# EAGLE board MRCS-Integrated-Turnout-Controller-array (EAGLE 7.7.0)
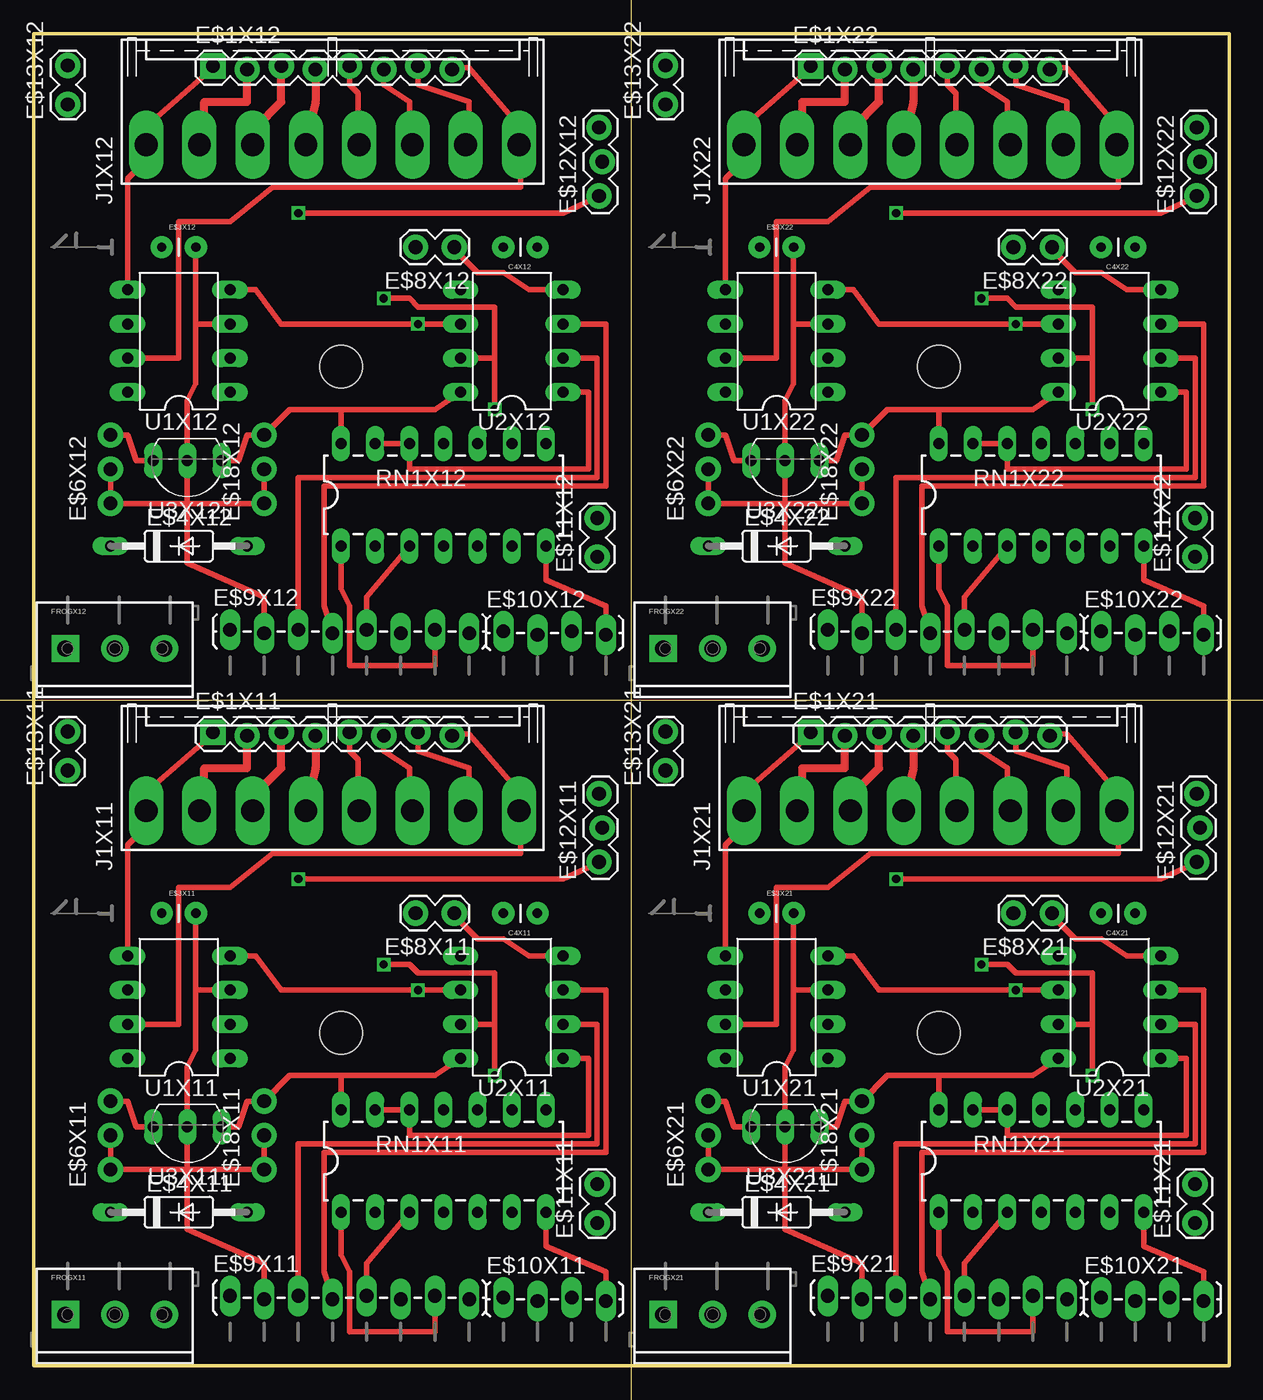
[diagram p0: board, top side]
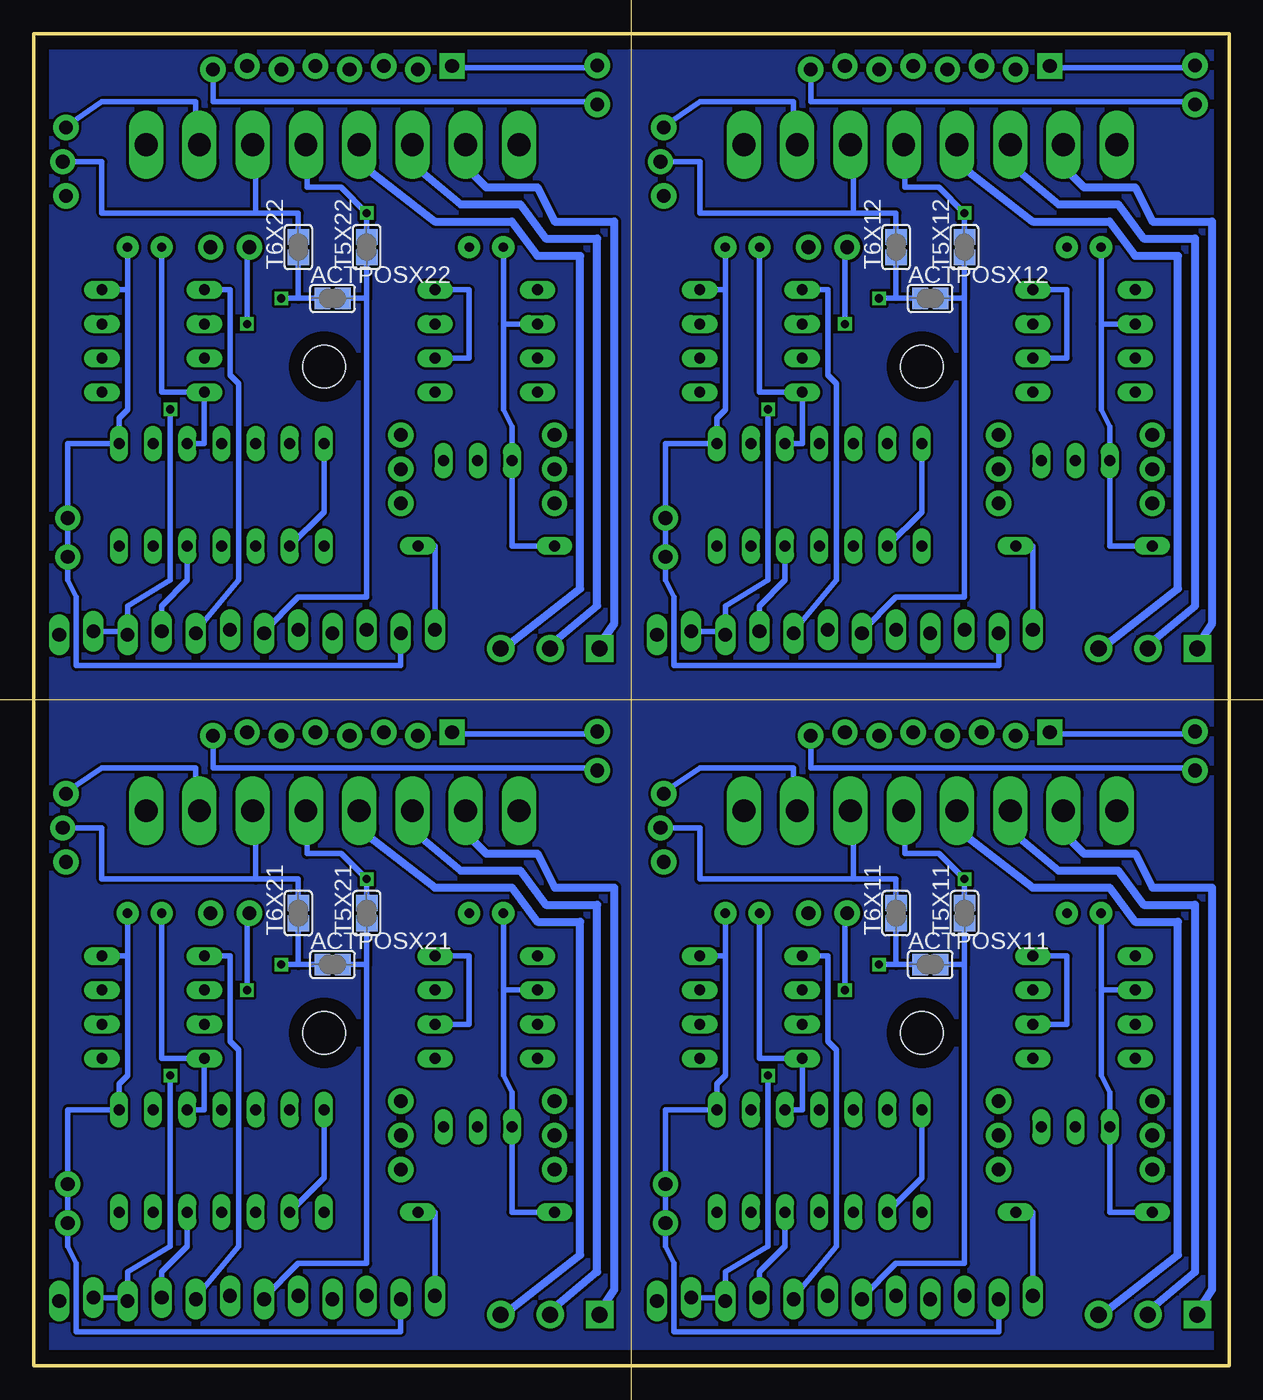
[diagram p1: board, bottom side, seen from below]

Size 88.9 x 99.06 mm. Coordinates in mm from the lower left corner, seen from the top.
Outline: 0,0 88.9,0 88.9,99.06 0,99.06 0,0
Copper layers (1*16): Top 0.035mm / dielectric 1.5mm / Bottom 0.035mm
Design rules "default": minimum track width 10mil, minimum drill 24mil, track to track 8mil, track to pad 8mil, pad to pad 8mil, via to via 8mil, smd to smd 8mil, copper to edge 40mil, drill to drill 8mil, minimum pad ring 10mil, minimum via ring 8mil, stop-mask expansion 4mil, vias tented up to drill 0mil, thermal gap 10mil
Milling: 2 lines

## Footprints (pad centres in the part's own frame; a part is rotated, then mirrored left to right if it is on the bottom)
SJ = smd 1.168 x 1.6: 1 -0.762,0; 2 0.762,0
CAP-PTH-SMALL = drill 0.7 pad 1.651: 1 0,0; 2 2.54,0
1X08_LOCK = drill 1.016 pad 1.88 square: 1 0,0.127 | drill 1.016 pad 1.88: 2 2.54,-0.127; 3 5.08,0.127; 4 7.62,-0.127; 5 10.16,0.127; 6 12.7,-0.127; 7 15.24,0.127; 8 17.78,-0.127
DRILL_0.1250 = hole 3.175: 0,0
C2992 = drill 0.813 long: A 5.08,0; C -5.08,0
1X03_NO_SILK = drill 1.016 pad 1.88: 1 0,0; 2 2.54,0; 3 5.08,0
1X02_LOCK = drill 1.016 pad 1.88: 1 -0.178,0; 2 2.718,0
1X08_LOCK_LONGPADS = drill 1.016 long: 1 0,0.127; 2 2.54,-0.127; 3 5.08,0.127; 4 7.62,-0.127; 5 10.16,0.127; 6 12.7,-0.127; 7 15.24,0.127; 8 17.78,-0.127
1X04_LOCK_LONGPADS = drill 1.016 long: 1 0,0; 2 2.54,-0.254; 3 5.08,0; 4 7.62,-0.254
1X03_LOCK = drill 1.016 pad 1.88: 1 0,0.127; 2 2.54,-0.127; 3 5.08,0.127
SCREWTERMINAL-3.5MM-3_LOCK.007S = drill 1.2 pad 2.032 square: 1 -0.178,0 | drill 1.2 pad 2.032: 2 3.5,0; 3 7.178,0
KK-156-8-F = drill 1.7 pad 2.184 long: 1 -13.86,0; 2 -9.9,0; 3 -5.94,0; 4 -1.98,0; 5 1.98,0; 6 5.94,0; 7 9.9,0; 8 13.86,0
DIL14 = drill 0.813 long: 1 -8.89,-3.81; 2 -6.35,-3.81; 3 -3.81,-3.81; 4 -1.27,-3.81; 5 1.27,-3.81; 6 3.81,-3.81; 7 6.35,-3.81; 8 6.35,3.81; 9 3.81,3.81; 10 1.27,3.81; 11 -1.27,3.81; 12 -3.81,3.81; 13 -6.35,3.81; 14 -8.89,3.81
DIL08 = drill 0.813 long: 1 -3.81,-3.81; 2 -1.27,-3.81; 3 1.27,-3.81; 4 3.81,-3.81; 5 3.81,3.81; 6 1.27,3.81; 7 -1.27,3.81; 8 -3.81,3.81
TO92-BCE = drill 0.813 long: B -2.54,0; C 0,0; E 2.54,0

## Placement (x,y rotation side)
ACTPOSX11  [SJ]  22.23,29.84 0 bottom
ACTPOSX12  [SJ]  22.23,79.38 0 bottom
ACTPOSX21  [SJ]  66.67,29.84 0 bottom
ACTPOSX22  [SJ]  66.67,79.38 0 bottom
C4X11  .01uf  [CAP-PTH-SMALL]  37.47,33.66 180 top
C4X12  .01uf  [CAP-PTH-SMALL]  37.47,83.19 180 top
C4X21  .01uf  [CAP-PTH-SMALL]  81.92,33.66 180 top
C4X22  .01uf  [CAP-PTH-SMALL]  81.92,83.19 180 top
E$1X11  [1X08_LOCK]  13.34,46.99 0 top
E$1X12  [1X08_LOCK]  13.34,96.52 0 top
E$1X21  [1X08_LOCK]  57.78,46.99 0 top
E$1X22  [1X08_LOCK]  57.78,96.52 0 top
E$2X11  [DRILL_0.1250]  22.86,24.77 0 top
E$2X12  [DRILL_0.1250]  22.86,74.3 0 top
E$2X21  [DRILL_0.1250]  67.31,24.77 0 top
E$2X22  [DRILL_0.1250]  67.31,74.3 0 top
E$3X11  [CAP-PTH-SMALL]  9.53,33.66 0 top
E$3X12  [CAP-PTH-SMALL]  9.53,83.19 0 top
E$3X21  [CAP-PTH-SMALL]  53.98,33.66 0 top
E$3X22  [CAP-PTH-SMALL]  53.98,83.19 0 top
E$4X11  [C2992]  10.79,11.43 0 top
E$4X12  [C2992]  10.79,60.96 0 top
E$4X21  [C2992]  55.24,11.43 0 top
E$4X22  [C2992]  55.24,60.96 0 top
E$5X11  [CA-PROP65WARNING]  3.17,24.13 270 top
E$5X12  [CA-PROP65WARNING]  3.17,73.66 270 top
E$5X21  [CA-PROP65WARNING]  47.62,24.13 270 top
E$5X22  [CA-PROP65WARNING]  47.62,73.66 270 top
E$6X11  [1X03_NO_SILK]  5.71,14.61 90 top
E$6X12  [1X03_NO_SILK]  5.71,64.14 90 top
E$6X21  [1X03_NO_SILK]  50.16,14.61 90 top
E$6X22  [1X03_NO_SILK]  50.16,64.14 90 top
E$7X11  [MRCSLOGOTOP]  6.35,32.38 90 top
E$7X12  [MRCSLOGOTOP]  6.35,81.92 90 top
E$7X21  [MRCSLOGOTOP]  50.8,32.38 90 top
E$7X22  [MRCSLOGOTOP]  50.8,81.92 90 top
E$8X11  [1X02_LOCK]  31.11,33.66 180 top
E$8X12  [1X02_LOCK]  31.11,83.19 180 top
E$8X21  [1X02_LOCK]  75.56,33.66 180 top
E$8X22  [1X02_LOCK]  75.56,83.19 180 top
E$9X11  [1X08_LOCK_LONGPADS]  14.61,5.08 0 top
E$9X12  [1X08_LOCK_LONGPADS]  14.61,54.61 0 top
E$9X21  [1X08_LOCK_LONGPADS]  59.05,5.08 0 top
E$9X22  [1X08_LOCK_LONGPADS]  59.05,54.61 0 top
E$10X11  [1X04_LOCK_LONGPADS]  34.92,5.08 0 top
E$10X12  [1X04_LOCK_LONGPADS]  34.92,54.61 0 top
E$10X21  [1X04_LOCK_LONGPADS]  79.38,5.08 0 top
E$10X22  [1X04_LOCK_LONGPADS]  79.38,54.61 0 top
E$11X11  [1X02_LOCK]  41.91,10.79 90 top
E$11X12  [1X02_LOCK]  41.91,60.33 90 top
E$11X21  [1X02_LOCK]  86.36,10.79 90 top
E$11X22  [1X02_LOCK]  86.36,60.33 90 top
E$12X11  [1X03_LOCK]  42.16,37.47 90 top
E$12X12  [1X03_LOCK]  42.16,87 90 top
E$12X21  [1X03_LOCK]  86.61,37.47 90 top
E$12X22  [1X03_LOCK]  86.61,87 90 top
E$13X11  [1X02_LOCK]  2.54,44.45 90 top
E$13X12  [1X02_LOCK]  2.54,93.98 90 top
E$13X21  [1X02_LOCK]  46.99,44.45 90 top
E$13X22  [1X02_LOCK]  46.99,93.98 90 top
E$18X11  [1X03_NO_SILK]  17.14,14.61 90 top
E$18X12  [1X03_NO_SILK]  17.14,64.14 90 top
E$18X21  [1X03_NO_SILK]  61.59,14.61 90 top
E$18X22  [1X03_NO_SILK]  61.59,64.14 90 top
FROGX11  [SCREWTERMINAL-3.5MM-3_LOCK.007S]  2.54,3.81 0 top
FROGX12  [SCREWTERMINAL-3.5MM-3_LOCK.007S]  2.54,53.34 0 top
FROGX21  [SCREWTERMINAL-3.5MM-3_LOCK.007S]  46.99,3.81 0 top
FROGX22  [SCREWTERMINAL-3.5MM-3_LOCK.007S]  46.99,53.34 0 top
J1X11  [KK-156-8-F]  22.23,41.27 0 top
J1X12  [KK-156-8-F]  22.23,90.81 0 top
J1X21  [KK-156-8-F]  66.67,41.27 0 top
J1X22  [KK-156-8-F]  66.67,90.81 0 top
RN1X11  1K  [DIL14]  31.75,15.24 0 top
RN1X12  1K  [DIL14]  31.75,64.77 0 top
RN1X21  1K  [DIL14]  76.2,15.24 0 top
RN1X22  1K  [DIL14]  76.2,64.77 0 top
T5X11  [SJ]  19.68,33.66 90 bottom
T5X12  [SJ]  19.68,83.19 90 bottom
T5X21  [SJ]  64.14,33.66 90 bottom
T5X22  [SJ]  64.14,83.19 90 bottom
T6X11  [SJ]  24.77,33.66 90 bottom
T6X12  [SJ]  24.77,83.19 90 bottom
T6X21  [SJ]  69.22,33.66 90 bottom
T6X22  [SJ]  69.22,83.19 90 bottom
U1X11  TC4428A  [DIL08]  10.79,26.67 90 top
U1X12  TC4428A  [DIL08]  10.79,76.2 90 top
U1X21  TC4428A  [DIL08]  55.24,26.67 90 top
U1X22  TC4428A  [DIL08]  55.24,76.2 90 top
U2X11  Tiny85  [DIL08]  35.56,26.67 90 top
U2X12  Tiny85  [DIL08]  35.56,76.2 90 top
U2X21  Tiny85  [DIL08]  80.01,26.67 90 top
U2X22  Tiny85  [DIL08]  80.01,76.2 90 top
U3X11  U3  [TO92-BCE]  11.43,17.78 180 top
U3X12  U3  [TO92-BCE]  11.43,67.31 180 top
U3X21  U3  [TO92-BCE]  55.88,17.78 180 top
U3X22  U3  [TO92-BCE]  55.88,67.31 180 top

## Library data of the parts
ACTPOSX11 ACTPOSX12 ACTPOSX21 ACTPOSX22 T5X11 T5X12 T5X21 T5X22 T6X11 T6X12 T6X21 T6X22 = jumper
C4X11 C4X12 C4X21 C4X22 E$3X11 E$3X12 E$3X21 E$3X22 = SparkFun-Passives
E$1X11 E$1X12 E$1X21 E$1X22 E$6X11 E$6X12 E$6X21 E$6X22 E$8X11 E$8X12 E$8X21 E$8X22 E$9X11 E$9X12 E$9X21 E$9X22 E$10X11 E$10X12 E$10X21 E$10X22 E$11X11 E$11X12 E$11X21 E$11X22 E$12X11 E$12X12 E$12X21 E$12X22 E$13X11 E$13X12 E$13X21 E$13X22 E$18X11 E$18X12 E$18X21 E$18X22 FROGX11 FROGX12 FROGX21 FROGX22 = SparkFun-Connectors
E$2X11 E$2X12 E$2X21 E$2X22 = special-drill
E$4X11 E$4X12 E$4X21 E$4X22 = diode
E$5X11 E$5X12 E$5X21 E$5X22 = MRCS-prop65warningBtm
E$7X11 E$7X12 E$7X21 E$7X22 = MRCSLogoTop
J1X11 J1X12 J1X21 J1X22 = SPCoast
RN1X11 RN1X12 RN1X21 RN1X22 = SparkFun-DigitalIC
U1X11 U1X12 U1X21 U1X22 U2X11 U2X12 U2X21 U2X22 = ic-package
U3X11 U3X12 U3X21 U3X22 = transistor

## Nets
S$1X11: C4X11.1
S$1X12: C4X12.1
S$1X21: C4X21.1
S$1X22: C4X22.1
S$2X11: E$10X11.1
S$2X12: E$10X12.1
S$2X21: E$10X21.1
S$2X22: E$10X22.1
S$3X11: U1X11.4 U2X11.6
S$3X12: U1X12.4 U2X12.6
S$3X21: U1X21.4 U2X21.6
S$3X22: U1X22.4 U2X22.6
S$6X11: U2X11.7
S$6X12: U2X12.7
S$6X21: U2X21.7
S$6X22: U2X22.7
S$7X11: E$3X11.2 U1X11.3
S$7X12: E$3X12.2 U1X12.3
S$7X21: E$3X21.2 U1X21.3
S$7X22: E$3X22.2 U1X22.3
S$9X11: U2X11.5
S$9X12: U2X12.5
S$9X21: U2X21.5
S$9X22: U2X22.5
S$10X11: U3X11.E
S$10X12: U3X12.E
S$10X21: U3X21.E
S$10X22: U3X22.E
S$13X11: U2X11.4
S$13X12: U2X12.4
S$13X21: U2X21.4
S$13X22: U2X22.4
S$14X11: U1X11.2
S$14X12: U1X12.2
S$14X21: U1X21.2
S$14X22: U1X22.2
S$19X11: U2X11.2
S$19X12: U2X12.2
S$19X21: U2X21.2
S$19X22: U2X22.2
S$29X11: C4X11.2 RN1X11.10 U2X11.8 U3X11.B
S$29X12: C4X12.2 RN1X12.10 U2X12.8 U3X12.B
S$29X21: C4X21.2 RN1X21.10 U2X21.8 U3X21.B
S$29X22: C4X22.2 RN1X22.10 U2X22.8 U3X22.B
S$30X11: U2X11.3
S$30X12: U2X12.3
S$30X21: U2X21.3
S$30X22: U2X22.3
S$31X11: U2X11.1
S$31X12: U2X12.1
S$31X21: U2X21.1
S$31X22: U2X22.1
S$33X11: U1X11.7
S$33X12: U1X12.7
S$33X21: U1X21.7
S$33X22: U1X22.7
S$39X11: U1X11.6
S$39X12: U1X12.6
S$39X21: U1X21.6
S$39X22: U1X22.6

## Tracks (layer width: path | path; a pad name or v marks a point on that pad's centre or on a via)
GNDX11
  pour Bottom: 0,0 44.45,0 44.45,49.53 0,49.53
GNDX12
  pour Bottom: 0,49.53 44.45,49.53 44.45,99.06 0,99.06
GNDX21
  pour Bottom: 44.45,0 88.9,0 88.9,49.53 44.45,49.53
GNDX22
  pour Bottom: 44.45,49.53 88.9,49.53 88.9,99.06 44.45,99.06
S$1X11
  Bottom 0.406: 41.91,19.05 38.1,19.05 38.1,20.95 37.47,21.59 C4X11.1
S$1X12
  Bottom 0.406: 41.91,68.58 38.1,68.58 38.1,70.48 37.47,71.12 C4X12.1
S$1X21
  Bottom 0.406: 86.36,19.05 82.55,19.05 82.55,20.95 81.92,21.59 C4X21.1
S$1X22
  Bottom 0.406: 86.36,68.58 82.55,68.58 82.55,70.48 81.92,71.12 C4X22.1
S$2X11
  Bottom 0.406: E$10X11.1 34.92,6.99 33.02,8.89 33.02,11.43
S$2X12
  Bottom 0.406: E$10X12.1 34.92,56.52 33.02,58.42 33.02,60.96
S$2X21
  Bottom 0.406: E$10X21.1 79.38,6.99 77.47,8.89 77.47,11.43
S$2X22
  Bottom 0.406: E$10X22.1 79.38,56.52 77.47,58.42 77.47,60.96
S$3X11  (via drill 0.6 pad 1.01)
  Top 0.406: U1X11.4 16.51,30.48 18.41,27.94 v28.57,27.94 U2X11.6
  Bottom 0.406: 28.57,33.66 v28.57,27.94
S$3X12  (via drill 0.6 pad 1.01)
  Top 0.406: U1X12.4 16.51,80.01 18.41,77.47 v28.57,77.47 U2X12.6
  Bottom 0.406: 28.57,83.19 v28.57,77.47
S$3X21  (via drill 0.6 pad 1.01)
  Top 0.406: U1X21.4 60.96,30.48 62.87,27.94 v73.03,27.94 U2X21.6
  Bottom 0.406: 73.03,33.66 v73.03,27.94
S$3X22  (via drill 0.6 pad 1.01)
  Top 0.406: U1X22.4 60.96,80.01 62.87,77.47 v73.03,77.47 U2X22.6
  Bottom 0.406: 73.03,83.19 v73.03,77.47
S$4X11
  Top 0.406: 6.99,38.73 8.26,40.01
S$4X12
  Top 0.406: 6.99,88.27 8.26,89.53
S$4X21
  Top 0.406: 51.44,38.73 52.7,40.01
S$4X22
  Top 0.406: 51.44,88.27 52.7,89.53
S$5X11
  Bottom 0.406: 13.34,46.99 2.54,46.99
S$5X12
  Bottom 0.406: 13.34,96.52 2.54,96.52
S$5X21
  Bottom 0.406: 57.78,46.99 46.99,46.99
S$5X22
  Bottom 0.406: 57.78,96.52 46.99,96.52
S$6X11  (via drill 0.6 pad 1.01)
  Top 0.406: v34.29,21.59 34.29,25.4 | U2X11.7 34.29,25.4 | 34.29,25.4 34.29,29.21 28.57,29.21 27.94,29.84 v26.04,29.84
  Bottom 0.406: 40.01,5.08 37.47,5.08 37.47,6.99 34.29,8.89 v34.29,21.59 | 19.68,29.84 v26.04,29.84
S$6X12  (via drill 0.6 pad 1.01)
  Top 0.406: v34.29,71.12 34.29,74.93 | U2X12.7 34.29,74.93 | 34.29,74.93 34.29,78.74 28.57,78.74 27.94,79.38 v26.04,79.38
  Bottom 0.406: 40.01,54.61 37.47,54.61 37.47,56.52 34.29,58.42 v34.29,71.12 | 19.68,79.38 v26.04,79.38
S$6X21  (via drill 0.6 pad 1.01)
  Top 0.406: v78.74,21.59 78.74,25.4 | U2X21.7 78.74,25.4 | 78.74,25.4 78.74,29.21 73.03,29.21 72.39,29.84 v70.48,29.84
  Bottom 0.406: 84.45,5.08 81.92,5.08 81.92,6.99 78.74,8.89 v78.74,21.59 | 64.14,29.84 v70.48,29.84
S$6X22  (via drill 0.6 pad 1.01)
  Top 0.406: v78.74,71.12 78.74,74.93 | U2X22.7 78.74,74.93 | 78.74,74.93 78.74,78.74 73.03,78.74 72.39,79.38 v70.48,79.38
  Bottom 0.406: 84.45,54.61 81.92,54.61 81.92,56.52 78.74,58.42 v78.74,71.12 | 64.14,79.38 v70.48,79.38
S$7X11
  Top 0.406: 12.06,27.94 U1X11.3 | 12.06,27.94 E$3X11.2 | 12.06,27.94 12.06,23.5 11.43,22.23 11.43,14.61 | 11.43,14.61 17.14,14.61 17.14,17.14 | 11.43,14.61 5.71,14.61 5.71,17.14 | 17.14,5.08 17.14,7.62 11.43,10.16 11.43,14.61
S$7X12
  Top 0.406: 12.06,77.47 U1X12.3 | 12.06,77.47 E$3X12.2 | 12.06,77.47 12.06,73.03 11.43,71.75 11.43,64.14 | 11.43,64.14 17.14,64.14 17.14,66.67 | 11.43,64.14 5.71,64.14 5.71,66.67 | 17.14,54.61 17.14,57.15 11.43,59.69 11.43,64.14
S$7X21
  Top 0.406: 56.52,27.94 U1X21.3 | 56.52,27.94 E$3X21.2 | 56.52,27.94 56.52,23.5 55.88,22.23 55.88,14.61 | 55.88,14.61 61.59,14.61 61.59,17.14 | 55.88,14.61 50.16,14.61 50.16,17.14 | 61.59,5.08 61.59,7.62 55.88,10.16 55.88,14.61
S$7X22
  Top 0.406: 56.52,77.47 U1X22.3 | 56.52,77.47 E$3X22.2 | 56.52,77.47 56.52,73.03 55.88,71.75 55.88,64.14 | 55.88,64.14 61.59,64.14 61.59,66.67 | 55.88,64.14 50.16,64.14 50.16,66.67 | 61.59,54.61 61.59,57.15 55.88,59.69 55.88,64.14
S$8X11
  Top 0.406: 29.84,5.08 29.84,2.54 23.5,2.54 23.5,6.99 22.86,8.26 22.86,11.43
S$8X12
  Top 0.406: 29.84,54.61 29.84,52.07 23.5,52.07 23.5,56.52 22.86,57.78 22.86,60.96
S$8X21
  Top 0.406: 74.3,5.08 74.3,2.54 67.94,2.54 67.94,6.99 67.31,8.26 67.31,11.43
S$8X22
  Top 0.406: 74.3,54.61 74.3,52.07 67.94,52.07 67.94,56.52 67.31,57.78 67.31,60.96
S$9X11
  Bottom 0.406: U2X11.5 29.84,30.48 29.84,24.13 29.21,23.5 29.21,8.89 32.38,5.08
S$9X12
  Bottom 0.406: U2X12.5 29.84,80.01 29.84,73.66 29.21,73.03 29.21,58.42 32.38,54.61
S$9X21
  Bottom 0.406: U2X21.5 74.3,30.48 74.3,24.13 73.66,23.5 73.66,8.89 76.83,5.08
S$9X22
  Bottom 0.406: U2X22.5 74.3,80.01 74.3,73.66 73.66,73.03 73.66,58.42 76.83,54.61
S$10X11
  Top 0.406: U3X11.E 7.62,17.78 6.99,19.68 5.71,19.68
S$10X12
  Top 0.406: U3X12.E 7.62,67.31 6.99,69.22 5.71,69.22
S$10X21
  Top 0.406: U3X21.E 52.07,17.78 51.44,19.68 50.16,19.68
S$10X22
  Top 0.406: U3X22.E 52.07,67.31 51.44,69.22 50.16,69.22
S$11X11
  Top 0.406: 24.77,5.08 24.77,7.62 27.94,11.43
S$11X12
  Top 0.406: 24.77,54.61 24.77,57.15 27.94,60.96
S$11X21
  Top 0.406: 69.22,5.08 69.22,7.62 72.39,11.43
S$11X22
  Top 0.406: 69.22,54.61 69.22,57.15 72.39,60.96
S$12X11
  Top 0.406: 6.99,30.48 6.99,38.73
S$12X12
  Top 0.406: 6.99,80.01 6.99,88.27
S$12X21
  Top 0.406: 51.44,30.48 51.44,38.73
S$12X22
  Top 0.406: 51.44,80.01 51.44,88.27
S$13X11
  Top 0.406: U2X11.4 36.83,30.48 34.92,31.75 33.02,31.75 31.11,33.66
  Bottom 0.406: U2X11.4 37.47,30.48
S$13X12
  Top 0.406: U2X12.4 36.83,80.01 34.92,81.28 33.02,81.28 31.11,83.19
  Bottom 0.406: U2X12.4 37.47,80.01
S$13X21
  Top 0.406: U2X21.4 81.28,30.48 79.38,31.75 77.47,31.75 75.56,33.66
  Bottom 0.406: U2X21.4 81.92,30.48
S$13X22
  Top 0.406: U2X22.4 81.28,80.01 79.38,81.28 77.47,81.28 75.56,83.19
  Bottom 0.406: U2X22.4 81.92,80.01
S$14X11
  Bottom 0.406: 14.61,30.48 12.06,30.48 12.06,25.4 U1X11.2
S$14X12
  Bottom 0.406: 14.61,80.01 12.06,80.01 12.06,74.93 U1X12.2
S$14X21
  Bottom 0.406: 59.05,30.48 56.52,30.48 56.52,25.4 U1X21.2
S$14X22
  Bottom 0.406: 59.05,80.01 56.52,80.01 56.52,74.93 U1X22.2
S$15X11
  Top 0.61: 12.7,41.91 12.7,44.45 15.88,44.45 15.88,46.99
S$15X12
  Top 0.61: 12.7,91.44 12.7,93.98 15.88,93.98 15.88,96.52
S$15X21
  Top 0.61: 57.15,41.91 57.15,44.45 60.33,44.45 60.33,46.99
S$15X22
  Top 0.61: 57.15,91.44 57.15,93.98 60.33,93.98 60.33,96.52
S$16X11
  Bottom 0.406: 24.77,29.84 24.77,36.2 27.94,36.2 | 27.94,36.2 27.94,39.37 | 27.94,36.2 39.37,36.2 39.37,40.01 42.16,40.01
S$16X12
  Bottom 0.406: 24.77,79.38 24.77,85.72 27.94,85.72 | 27.94,85.72 27.94,88.9 | 27.94,85.72 39.37,85.72 39.37,89.53 42.16,89.53
S$16X21
  Bottom 0.406: 69.22,29.84 69.22,36.2 72.39,36.2 | 72.39,36.2 72.39,39.37 | 72.39,36.2 83.82,36.2 83.82,40.01 86.61,40.01
S$16X22
  Bottom 0.406: 69.22,79.38 69.22,85.72 72.39,85.72 | 72.39,85.72 72.39,88.9 | 72.39,85.72 83.82,85.72 83.82,89.53 86.61,89.53
S$17X11
  Bottom 0.406: 32.38,42.55 32.38,44.45 39.37,44.45 42.16,42.55
S$17X12
  Bottom 0.406: 32.38,92.08 32.38,93.98 39.37,93.98 42.16,92.08
S$17X21
  Bottom 0.406: 76.83,42.55 76.83,44.45 83.82,44.45 86.61,42.55
S$17X22
  Bottom 0.406: 76.83,92.08 76.83,93.98 83.82,93.98 86.61,92.08
S$18X11
  Top 0.406: 23.5,46.99 23.5,45.72 24.13,45.09 24.13,42.55
S$18X12
  Top 0.406: 23.5,96.52 23.5,95.25 24.13,94.61 24.13,92.08
S$18X21
  Top 0.406: 67.94,46.99 67.94,45.72 68.58,45.09 68.58,42.55
S$18X22
  Top 0.406: 67.94,96.52 67.94,95.25 68.58,94.61 68.58,92.08
S$19X11
  Top 0.406: 19.68,5.08 19.68,16.51 41.91,16.51 41.91,25.4 U2X11.2
S$19X12
  Top 0.406: 19.68,54.61 19.68,66.04 41.91,66.04 41.91,74.93 U2X12.2
S$19X21
  Top 0.406: 64.14,5.08 64.14,16.51 86.36,16.51 86.36,25.4 U2X21.2
S$19X22
  Top 0.406: 64.14,54.61 64.14,66.04 86.36,66.04 86.36,74.93 U2X22.2
S$20X11
  Top 0.406: 31.11,46.99 32.38,46.99 36.2,42.55 35.56,41.91
S$20X12
  Top 0.406: 31.11,96.52 32.38,96.52 36.2,92.08 35.56,91.44
S$20X21
  Top 0.406: 75.56,46.99 76.83,46.99 80.64,42.55 80.01,41.91
S$20X22
  Top 0.406: 75.56,96.52 76.83,96.52 80.64,92.08 80.01,91.44
S$21X11
  Bottom 0.406: 22.86,19.05 22.86,13.97 25.4,11.43
S$21X12
  Bottom 0.406: 22.86,68.58 22.86,63.5 25.4,60.96
S$21X21
  Bottom 0.406: 67.31,19.05 67.31,13.97 69.85,11.43
S$21X22
  Bottom 0.406: 67.31,68.58 67.31,63.5 69.85,60.96
S$22X11
  Bottom 0.406: 31.11,46.99 31.11,44.45
S$22X12
  Bottom 0.406: 31.11,96.52 31.11,93.98
S$22X21
  Bottom 0.406: 75.56,46.99 75.56,44.45
S$22X22
  Bottom 0.406: 75.56,96.52 75.56,93.98
S$23X11
  Top 0.406: 26.04,46.99 26.04,45.72 27.94,44.45 27.94,41.91
S$23X12
  Top 0.406: 26.04,96.52 26.04,95.25 27.94,93.98 27.94,91.44
S$23X21
  Top 0.406: 70.48,46.99 70.48,45.72 72.39,44.45 72.39,41.91
S$23X22
  Top 0.406: 70.48,96.52 70.48,95.25 72.39,93.98 72.39,91.44
S$24X11
  Top 0.61: 20.95,46.99 20.95,44.45 20.32,41.91
S$24X12
  Top 0.61: 20.95,96.52 20.95,93.98 20.32,91.44
S$24X21
  Top 0.61: 65.41,46.99 65.41,44.45 64.77,41.91
S$24X22
  Top 0.61: 65.41,96.52 65.41,93.98 64.77,91.44
S$25X11
  Top 0.406: 13.34,46.99 8.26,42.55
S$25X12
  Top 0.406: 13.34,96.52 8.26,92.08
S$25X21
  Top 0.406: 57.78,46.99 52.7,42.55
S$25X22
  Top 0.406: 57.78,96.52 52.7,92.08
S$26X11
  Top 0.61: 16.51,42.55 18.41,44.45 18.41,46.99
S$26X12
  Top 0.61: 16.51,92.08 18.41,93.98 18.41,96.52
S$26X21
  Top 0.61: 60.96,42.55 62.87,44.45 62.87,46.99
S$26X22
  Top 0.61: 60.96,92.08 62.87,93.98 62.87,96.52
S$27X11
  Bottom 0.406: 27.3,5.08 24.77,7.62 19.68,7.62 19.68,29.84
S$27X12
  Bottom 0.406: 27.3,54.61 24.77,57.15 19.68,57.15 19.68,79.38
S$27X21
  Bottom 0.406: 71.75,5.08 69.22,7.62 64.14,7.62 64.14,29.84
S$27X22
  Bottom 0.406: 71.75,54.61 69.22,57.15 64.14,57.15 64.14,79.38
S$28X11
  Bottom 0.406: 31.11,44.45 2.54,44.45
S$28X12
  Bottom 0.406: 31.11,93.98 2.54,93.98
S$28X21
  Bottom 0.406: 75.56,44.45 46.99,44.45
S$28X22
  Bottom 0.406: 75.56,93.98 46.99,93.98
S$29X11
  Top 0.406: U3X11.B 15.24,17.78 15.88,19.68 17.14,19.68 19.05,21.59 22.86,21.59 | U2X11.8 29.84,21.59 22.86,21.59 | 22.86,21.59 22.86,19.68
  Bottom 0.406: C4X11.2 34.92,22.86 U2X11.8 31.75,19.05 RN1X11.10
S$29X12
  Top 0.406: U3X12.B 15.24,67.31 15.88,69.22 17.14,69.22 19.05,71.12 22.86,71.12 | U2X12.8 29.84,71.12 22.86,71.12 | 22.86,71.12 22.86,69.22
  Bottom 0.406: C4X12.2 34.92,72.39 U2X12.8 31.75,68.58 RN1X12.10
S$29X21
  Top 0.406: U3X21.B 59.69,17.78 60.33,19.68 61.59,19.68 63.5,21.59 67.31,21.59 | U2X21.8 74.3,21.59 67.31,21.59 | 67.31,21.59 67.31,19.68
  Bottom 0.406: C4X21.2 79.38,22.86 U2X21.8 76.2,19.05 RN1X21.10
S$29X22
  Top 0.406: U3X22.B 59.69,67.31 60.33,69.22 61.59,69.22 63.5,71.12 67.31,71.12 | U2X22.8 74.3,71.12 67.31,71.12 | 67.31,71.12 67.31,69.22
  Bottom 0.406: C4X22.2 79.38,72.39 U2X22.8 76.2,68.58 RN1X22.10
S$30X11
  Top 0.406: U2X11.3 42.55,27.94 42.55,15.88 21.59,15.88 21.59,6.99 22.23,5.08
S$30X12
  Top 0.406: U2X12.3 42.55,77.47 42.55,65.41 21.59,65.41 21.59,56.52 22.23,54.61
S$30X21
  Top 0.406: U2X21.3 87,27.94 87,15.88 66.04,15.88 66.04,6.99 66.67,5.08
S$30X22
  Top 0.406: U2X22.3 87,77.47 87,65.41 66.04,65.41 66.04,56.52 66.67,54.61
S$31X11
  Top 0.406: 25.4,19.05 27.94,19.05 27.94,17.14 41.27,17.14 41.27,22.86 U2X11.1
S$31X12
  Top 0.406: 25.4,68.58 27.94,68.58 27.94,66.67 41.27,66.67 41.27,72.39 U2X12.1
S$31X21
  Top 0.406: 69.85,19.05 72.39,19.05 72.39,17.14 85.72,17.14 85.72,22.86 U2X21.1
S$31X22
  Top 0.406: 69.85,68.58 72.39,68.58 72.39,66.67 85.72,66.67 85.72,72.39 U2X22.1
S$32X11
  Bottom 0.61: 20.32,40.01 14.61,35.56 8.89,35.56 6.99,33.02 3.81,33.02 3.81,8.26 9.53,3.81
S$32X12
  Bottom 0.61: 20.32,89.53 14.61,85.09 8.89,85.09 6.99,82.55 3.81,82.55 3.81,57.78 9.53,53.34
S$32X21
  Bottom 0.61: 64.77,40.01 59.05,35.56 53.34,35.56 51.44,33.02 48.26,33.02 48.26,8.26 53.98,3.81
S$32X22
  Bottom 0.61: 64.77,89.53 59.05,85.09 53.34,85.09 51.44,82.55 48.26,82.55 48.26,57.78 53.98,53.34
S$33X11
  Top 0.406: U1X11.7 10.79,25.4 10.79,35.56 14.61,35.56 17.78,38.1 36.2,38.1 36.2,40.01
S$33X12
  Top 0.406: U1X12.7 10.79,74.93 10.79,85.09 14.61,85.09 17.78,87.63 36.2,87.63 36.2,89.53
S$33X21
  Top 0.406: U1X21.7 55.24,25.4 55.24,35.56 59.05,35.56 62.23,38.1 80.64,38.1 80.64,40.01
S$33X22
  Top 0.406: U1X22.7 55.24,74.93 55.24,85.09 59.05,85.09 62.23,87.63 80.64,87.63 80.64,89.53
S$34X11
  Bottom 0.406: 17.14,5.08 17.14,2.54 41.27,2.54 41.27,7.62 41.91,8.89 41.91,19.05
S$34X12
  Bottom 0.406: 17.14,54.61 17.14,52.07 41.27,52.07 41.27,57.15 41.91,58.42 41.91,68.58
S$34X21
  Bottom 0.406: 61.59,5.08 61.59,2.54 85.72,2.54 85.72,7.62 86.36,8.89 86.36,19.05
S$34X22
  Bottom 0.406: 61.59,54.61 61.59,52.07 85.72,52.07 85.72,57.15 86.36,58.42 86.36,68.58
S$35X11
  Top 0.406: 38.1,11.43 38.1,8.89 42.55,6.99 42.55,5.08
S$35X12
  Top 0.406: 38.1,60.96 38.1,58.42 42.55,56.52 42.55,54.61
S$35X21
  Top 0.406: 82.55,11.43 82.55,8.89 87,6.99 87,5.08
S$35X22
  Top 0.406: 82.55,60.96 82.55,58.42 87,56.52 87,54.61
S$36X11  (via drill 0.6 pad 1.01)
  Top 0.406: v19.68,36.2 39.37,36.2 42.16,37.47
  Bottom 0.406: 19.68,29.84 v19.68,36.2 21.59,38.1 24.13,38.1 24.13,40.01
S$36X12  (via drill 0.6 pad 1.01)
  Top 0.406: v19.68,85.72 39.37,85.72 42.16,87
  Bottom 0.406: 19.68,79.38 v19.68,85.72 21.59,87.63 24.13,87.63 24.13,89.53
S$36X21  (via drill 0.6 pad 1.01)
  Top 0.406: v64.14,36.2 83.82,36.2 86.61,37.47
  Bottom 0.406: 64.14,29.84 v64.14,36.2 66.04,38.1 68.58,38.1 68.58,40.01
S$36X22  (via drill 0.6 pad 1.01)
  Top 0.406: v64.14,85.72 83.82,85.72 86.61,87
  Bottom 0.406: 64.14,79.38 v64.14,85.72 66.04,87.63 68.58,87.63 68.58,89.53
S$37X11
  Top 0.406: 28.57,46.99 28.57,45.72 32.38,44.45 32.38,42.55
S$37X12
  Top 0.406: 28.57,96.52 28.57,95.25 32.38,93.98 32.38,92.08
S$37X21
  Top 0.406: 73.03,46.99 73.03,45.72 76.83,44.45 76.83,42.55
S$37X22
  Top 0.406: 73.03,96.52 73.03,95.25 76.83,93.98 76.83,92.08
S$38X11
  Bottom 0.406: 15.88,11.43 14.61,11.43 14.61,5.08
S$38X12
  Bottom 0.406: 15.88,60.96 14.61,60.96 14.61,54.61
S$38X21
  Bottom 0.406: 60.33,11.43 59.05,11.43 59.05,5.08
S$38X22
  Bottom 0.406: 60.33,60.96 59.05,60.96 59.05,54.61
S$39X11
  Bottom 0.406: 9.53,27.94 U1X11.6 | 9.53,33.66 9.53,27.94 | 9.53,27.94 9.53,21.59 8.89,20.32 8.89,11.43 5.71,11.43
S$39X12
  Bottom 0.406: 9.53,77.47 U1X12.6 | 9.53,83.19 9.53,77.47 | 9.53,77.47 9.53,71.12 8.89,69.85 8.89,60.96 5.71,60.96
S$39X21
  Bottom 0.406: 53.98,27.94 U1X21.6 | 53.98,33.66 53.98,27.94 | 53.98,27.94 53.98,21.59 53.34,20.32 53.34,11.43 50.16,11.43
S$39X22
  Bottom 0.406: 53.98,77.47 U1X22.6 | 53.98,83.19 53.98,77.47 | 53.98,77.47 53.98,71.12 53.34,69.85 53.34,60.96 50.16,60.96
S$40X11
  Bottom 0.61: 16.51,40.01 12.7,36.83 8.26,36.83 6.35,34.29 2.54,34.29 2.54,6.99 6.35,3.81
S$40X12
  Bottom 0.61: 16.51,89.53 12.7,86.36 8.26,86.36 6.35,83.82 2.54,83.82 2.54,56.52 6.35,53.34
S$40X21
  Bottom 0.61: 60.96,40.01 57.15,36.83 52.7,36.83 50.8,34.29 46.99,34.29 46.99,6.99 50.8,3.81
S$40X22
  Bottom 0.61: 60.96,89.53 57.15,86.36 52.7,86.36 50.8,83.82 46.99,83.82 46.99,56.52 50.8,53.34
S$43X11
  Bottom 0.61: 12.7,40.01 10.79,38.1 6.99,38.1 5.71,35.56 1.27,35.56 1.27,5.71 2.54,3.81
S$43X12
  Bottom 0.61: 12.7,89.53 10.79,87.63 6.99,87.63 5.71,85.09 1.27,85.09 1.27,55.24 2.54,53.34
S$43X21
  Bottom 0.61: 57.15,40.01 55.24,38.1 51.44,38.1 50.16,35.56 45.72,35.56 45.72,5.71 46.99,3.81
S$43X22
  Bottom 0.61: 57.15,89.53 55.24,87.63 51.44,87.63 50.16,85.09 45.72,85.09 45.72,55.24 46.99,53.34

## Text on the board
Milling: V-Score | V-Score
tDocu: J2 | J2 | 1 | 1 | 8 | J1 | 1 | 1 | 8 | J1 | 8 | 8 | 7 | 7 | X-Over | X-Over | 6 | 6 | 5 | 5 | 1 | 2 | 3 | 4 | 5 | 6 | 7 | 8 | 1 | 2 | 3 | 4 | 5 | 6 | 7 | 8 | C4 | C1 | C4 | C1 | J4 | J6 | J4 | J6 | Gnd | Gnd | 4 | 4 | THRW | THRW | 8 | 8 | 1 | 1 | 1 | 1 | MRCS Designs | 00119-2021 v1.3a | ITC | U2 | 5v | 8 | U1 | MRCS Designs | 00119-2021 v1.3a | ITC | U2 | 5v | 8 | U1 | + | + | + | + | .33uf | .1uf | .33uf | .1uf | C2 | C2 | D1 | D1 | C3 | C3 | Gnd | Gnd | - | - | J3 | J3 | R | N | FROG | J5 | R | N | FROG | J5 | ST1 | ST1 | 1 | 2 | 3 | 4 | 5 | 6 | 7 | 8 | 9 | 10 | 11 | 12 | 1 | 2 | 3 | 4 | 5 | 6 | 7 | 8 | 9 | 10 | 11 | 12 | +V | -V | Rem | Lcl | ULk | FB | U+ | U- | N+ | N- | R+ | R- | +V | -V | Rem | Lcl | ULk | FB | U+ | U- | N+ | N- | R+ | R- | J2 | J2 | 1 | 1 | 1 | 8 | J1 | 1 | 8 | J1 | 8 | 8 | 7 | 7 | X-Over | X-Over | 6 | 6 | 5 | 5 | 1 | 2 | 3 | 4 | 5 | 6 | 7 | 8 | 1 | 2 | 3 | 4 | 5 | 6 | 7 | 8 | C4 | C1 | C4 | C1 | J4 | J6 | J4 | J6 | Gnd | Gnd | 4 | 4 | THRW | THRW | 8 | 8 | 1 | 1 | 1 | 1 | MRCS Designs | 00119-2021 v1.3a | ITC | 8 | U1 | MRCS Designs | 00119-2021 v1.3a | ITC | 8 | U1 | U2 | + | 5v | U2 | + | 5v | + | + | .1uf | .1uf | .33uf | .33uf | C2 | C2 | D1 | C3 | D1 | C3 | - | Gnd | - | Gnd | J3 | J3 | R | N | FROG | J5 | R | N | FROG | J5 | ST1 | ST1 | 1 | 2 | 3 | 4 | 5 | 6 | 7 | 8 | 9 | 10 | 11 | 12 | 1 | 2 | 3 | 4 | 5 | 6 | 7 | 8 | 9 | 10 | 11 | 12 | +V | -V | Rem | Lcl | ULk | FB | U+ | U- | N+ | N- | R+ | R- | +V | -V | Rem | Lcl | ULk | FB | U+ | U- | N+ | N- | R+ | R-
bDocu: Integrated Turnout Controller | Integrated Turnout Controller | Integrated Turnout Controller | Integrated Turnout Controller
_tValues: U3 | U3 | U3 | U3 | U3 | U3 | U3 | U3 | U3 | U3 | U3 | U3 | U3 | U3 | U3 | U3 | U3 | U3 | U3 | U3 | U3 | U3 | U3 | U3 | U3 | U3 | U3 | U3 | U3 | U3 | U3 | U3
_tDocu: RN1 | RN1 | RN1 | RN1 | RN1 | RN1 | RN1 | RN1 | RN1 | RN1 | RN1 | RN1 | RN1 | RN1 | RN1 | RN1 | RN1 | RN1 | RN1 | RN1 | RN1 | RN1 | RN1 | RN1 | RN1 | RN1 | RN1 | RN1 | RN1 | RN1 | RN1 | RN1
_bDocu: T5 | T5 | T5 | T5 | T5 | T5 | T5 | T5 | T6 | T6 | T6 | T6 | T6 | T6 | T6 | T6 | T5 | T5 | T5 | T5 | T5 | T5 | T5 | T5 | T6 | T6 | T6 | T6 | T6 | T6 | T6 | T6 | ACTPOS | ACTPOS | ACTPOS | ACTPOS | ACTPOS | ACTPOS | ACTPOS | ACTPOS | ACTPOS | ACTPOS | ACTPOS | ACTPOS | ACTPOS | ACTPOS | ACTPOS | ACTPOS | T5 | T5 | T5 | T5 | T5 | T5 | T5 | T5 | T6 | T6 | T6 | T6 | T6 | T6 | T6 | T6 | T5 | T5 | T5 | T5 | T5 | T5 | T5 | T5 | T6 | T6 | T6 | T6 | T6 | T6 | T6 | T6 | ACTPOS | ACTPOS | ACTPOS | ACTPOS | ACTPOS | ACTPOS | ACTPOS | ACTPOS | ACTPOS | ACTPOS | ACTPOS | ACTPOS | ACTPOS | ACTPOS | ACTPOS | ACTPOS